# Altium PCB WUST_DEMO.PcbDoc
Units mm, origin at the board's own origin, x right, y up, seen from the top; angles counter-clockwise.
Board outline 17.27 x 24.38 mm, 2 copper layers (Top Layer, Bottom Layer); 24 components, 27 nets, 115 pads, 29 vias.
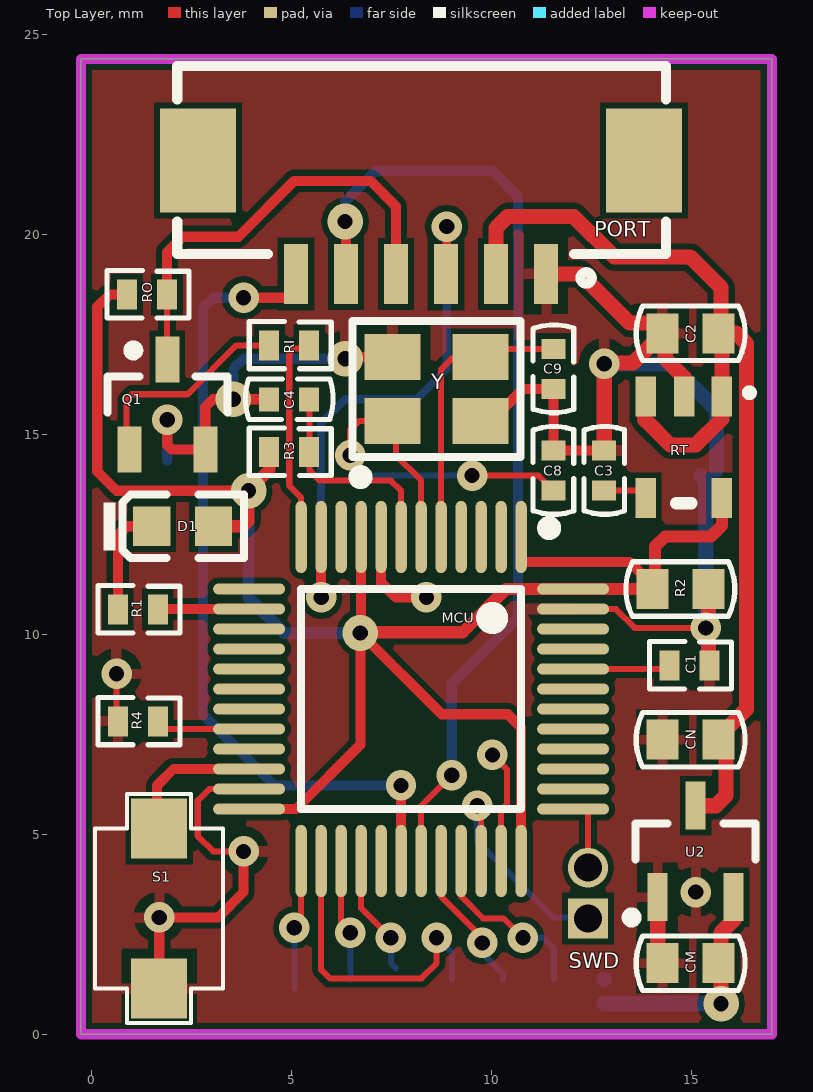
[diagram p0: Top Layer view]
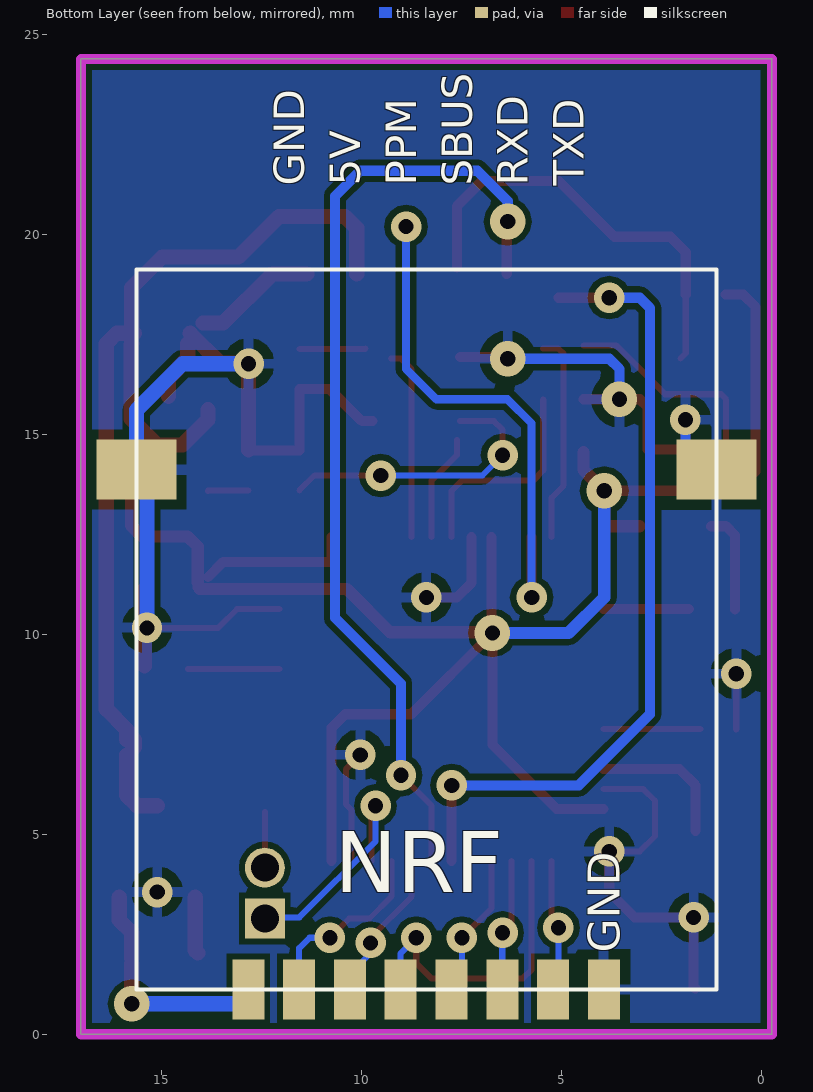
[diagram p1: Bottom Layer view, seen from below]
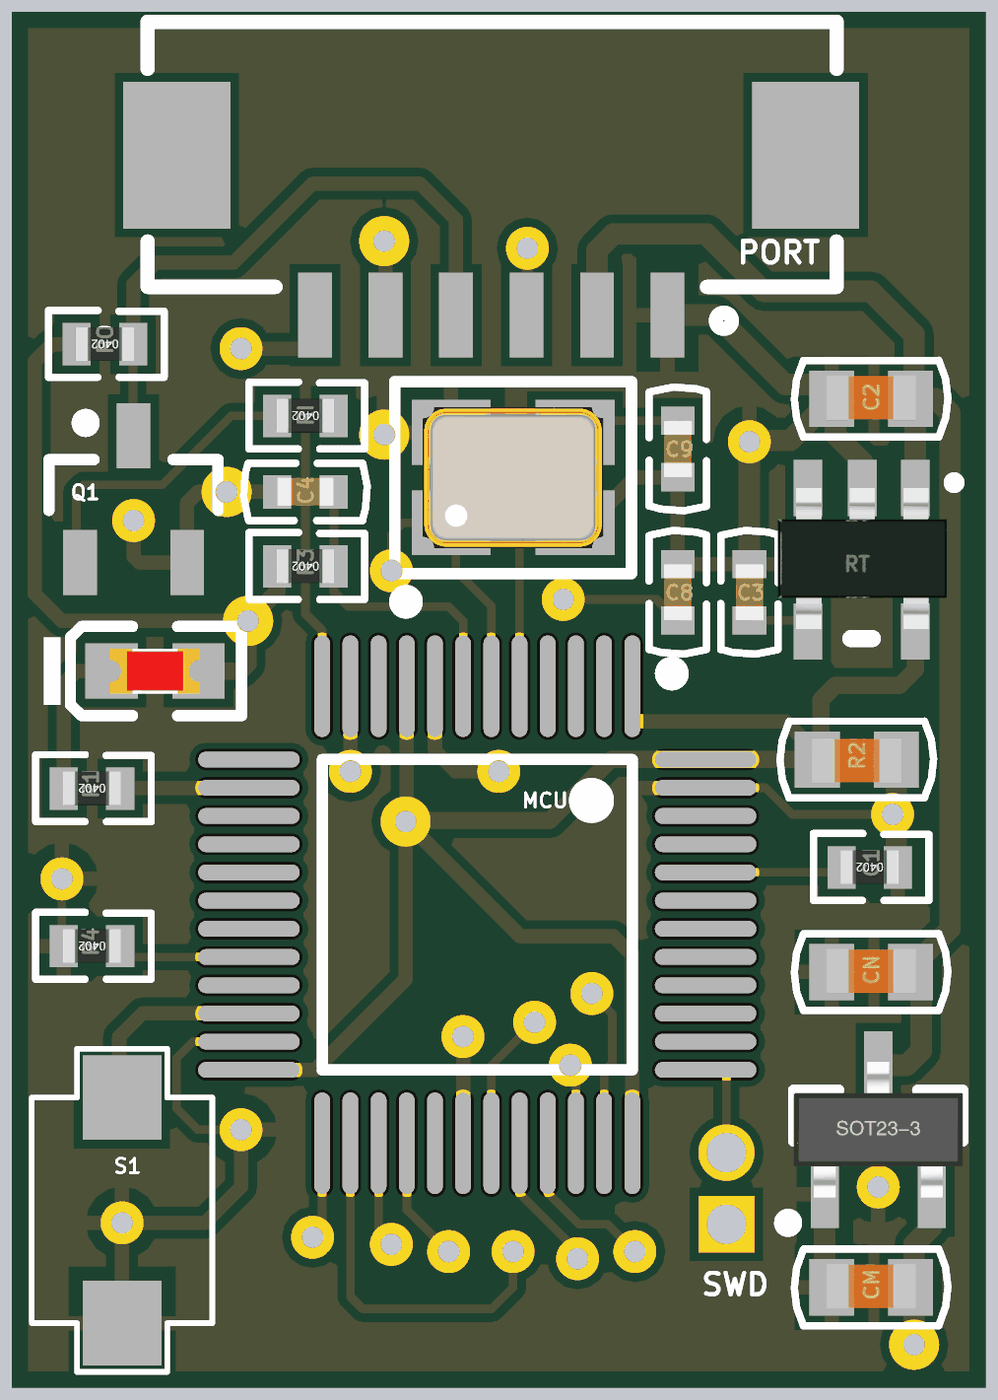
[diagram p2: 3D render of the assembled board from above, using the file's embedded part models]

## Layer stack, top to bottom
Top Solder: solder mask 0.0102, Solder Resist, Dk 3.5
Top Layer: signal copper 0.0356
Dielectric1: dielectric 0.32, FR-4, Dk 4.8
Bottom Layer: signal copper 0.0356
Bottom Solder: solder mask 0.0102, Solder Resist, Dk 3.5

## Board outline
-0.254,0 -0.254,24.384 17.018,24.384 17.018,0

## Design rules (kind name [scope] priority, off if disabled: settings)
Clearance [All] p1: gap=0.152 ignorepadtopadclearanceinfootprint=FALSE except(0: Arc-Hole Track-Hole SMDPad-Hole THPad-Hole Via-Hole Fill-Hole Poly-Hole Region-Hole Text-Hole)
ComponentClearance [All] p1: gap=0 collisioncheckmode=3 verticalgap=0 showdistances=FALSE
FabricationTestpoint [(IsPad And (OnTopLayer Or OnBottomLayer))] p1: side=3 testpointundercomponent=TRUE minsize=1.016 maxsize=2.54 preferedsize=1.524 minholesize=0 maxholesize=1.016 preferedholesize=0.813 testpointgrid=0.025 allowsidetop=TRUE allowsidebottom=TRUE usegrid=TRUE gridtolerance=0
HoleSize [All] p1: absolutevalues=TRUE maxlimit=7.62 minlimit=0.025 maxpercent=80.000 minpercent=20.000
HoleToHoleClearance [All] p1: gap=0 allowstackedmicrovias=TRUE
MinimumSolderMaskSliver [All] p1: minsoldermaskwidth=0
PolygonConnect [All] p1: connectstyle=Relief reliefconductorwidth=0.254 reliefentries=4 polygonreliefangle="90 Angle" airgapwidth=0.254
RoutingVias [All] p1: holewidth=0.711 width=1.27 viastyle="Through Hole" minholewidth=0.381 minwidth=0.635 maxholewidth=7.62 maxwidth=12.7
SilkToSilkClearance [All] p1: silktosilkclearance=0
SilkToSolderMaskClearance SilkscreenOverComponentPads [IsPad] p1: minsilkscreentomaskgap=0 clearancetoexposedcopper=TRUE
SolderMaskExpansion [All] p1: expansion=0
Width [All] p1: maxlimit=2.54 minlimit=0.152 preferedwidth=0.152
23 further rules are at their usual default settings.

## Components (designator, comment, footprint, x,y, rotation, side; value= is the part's Value field where it differs from the comment)
C1 "Cap" 0603C 14.732,11.132 r180 top value=1uF
C2 "Cap" 0603C 14.986,17.526 r0 top value=1uF
C3 "Cap" 0402C 12.827,14.097 r270 top value=0.1uF
C4 "Cap" 0402C 4.953,15.875 r0 top value=104
C8 "Cap" 0402C 11.557,14.097 r270 top value=12pf
C9 "Cap" 0402C 11.557,16.637 r270 top value=12pf
CM "1uf" 0603C 14.986,1.778 r0 top
CN "1uf" 0603C 14.986,7.366 r0 top
D1 "LED" 0603_LED 2.286,12.7 r0 top
MCU "STM32F103C" LQFP-48_7x7x05P 8.001,8.382 r180 top
NRF "Header 10" PE01-ML01SP4 8.382,7.62 r90 bottom
PORT "Header 6" 1.25_6P 8.001,21.336 r0 top
Q1 "NPN" SOT23_N 1.905,15.748 r90 top
R1 "470R" 0402R 1.169,10.668 r180 top value=0402
R2 "Res2" 0402R 14.961,9.271 r180 top value=0402
R3 "Res2" 0402R 4.953,14.605 r180 top value=0402
R4 "Res2" 0402R 1.169,7.874 r180 top value=0402
RI "res1" 0402R 4.953,17.272 r180 top value=1K
RO "Res1" 0402R 1.397,18.542 r180 top value=10K
RT "RT9193" SOT23_5 14.818,14.859 r180 top
S1 "微动开关" KEY3420P 1.651,3.048 r90 top
SWD "Header 2" pad 12.446,2.921 r90 top
U2 "662K" SOT23-3N 15.113,4.572 r0 top
Y "25M" SMD-3225_4P 8.636,16.129 r0 top

## Footprints (in the part's own frame and the unit in brackets; to place one, negate y for a bottom-side part, rotate by r counter-clockwise, add the part's x,y. Pads: shape width x height; smd on the part's side, far side on the other; paste and mask are expansions set on the pad)
1.25_6P [mm]
  rect 0.6x1.5 smd: 1(3.373,-2.327) 2(2.123,-2.327) 3(0.873,-2.327) 4(-0.377,-2.327) 5(-1.627,-2.327) 6(-2.877,-2.327)
  rect 1.9x2.6 smd: 7(-5.327,0.508) 8(5.823,0.508)
  silkscreen extent -5.85,-2.57 6.37,2.87
0402C [mm]
  rect 0.5x0.6 smd: 1(-0.5,0) 2(0.5,0)
  silkscreen extent -1.1,-0.51 1.1,0.51, body extent -0.5,-0.25 0.5,0.25, height 0.6
0402R [mm]
  rect 0.5x0.75 smd: 1(-0.5,0.05) 2(0.5,0.05)
  silkscreen extent -1.05,-0.55 1,0.64, body extent -0.52,-0.25 0.52,0.35, height 0.34
0603_LED [mm]
  rect 0.93x0.98 smd: 1(0.77,0) 2(-0.77,0)
  silkscreen extent -1.97,-0.79 1.54,0.79, body extent -0.8,-0.4 0.8,0.4, height 0.6
0603C [mm]
  rect 0.8x1 smd: 1(-0.7,0) 2(0.7,0)
  silkscreen extent -1.36,-0.68 1.36,0.68, body extent -0.8,-0.38 0.8,0.42, height 0.5
KEY3420P [mm]
  rect 1.5x1.4 smd: 1(-1.905,-0.051) 2(2.095,-0.051)
  silkscreen extent -2.77,-1.65 2.96,1.55
LQFP-48_7x7x05P [mm]
  oval 0.28x1.8 smd mask+0.051: 1(-2.75,-4.05) 2(-2.25,-4.05) 3(-1.75,-4.05) 4(-1.25,-4.05) 5(-0.75,-4.05) 6(-0.25,-4.05) 7(0.25,-4.05) 8(0.75,-4.05) 9(1.25,-4.05) 10(1.75,-4.05) 11(2.25,-4.05) 12(2.75,-4.05) 25(2.75,4.05) 26(2.25,4.05) 27(1.75,4.05) 28(1.25,4.05) 29(0.75,4.05) 30(0.25,4.05) 31(-0.25,4.05) 32(-0.75,4.05) 33(-1.25,4.05) 34(-1.75,4.05) 35(-2.25,4.05) 36(-2.75,4.05)
  oval 1.8x0.28 smd mask+0.051: 13(4.05,-2.75) 14(4.05,-2.25) 15(4.05,-1.75) 16(4.05,-1.25) 17(4.05,-0.75) 18(4.05,-0.25) 19(4.05,0.25) 20(4.05,0.75) 21(4.05,1.25) 22(4.05,1.75) 23(4.05,2.25) 24(4.05,2.75) 37(-4.05,2.75) 38(-4.05,2.25) 39(-4.05,1.75) 40(-4.05,1.25) 41(-4.05,0.75) 42(-4.05,0.25) 43(-4.05,-0.25) 44(-4.05,-0.75) 45(-4.05,-1.25) 46(-4.05,-1.75) 47(-4.05,-2.25) 48(-4.05,-2.75)
  silkscreen extent -3.6,-4.42 2.75,2.75
pad [mm]
  rect 1x1 hole 0.7: 1(-0.025,0.025)
  round 1 hole 0.7: 2(1.245,0.025)
PE01-ML01SP4 [mm] "18mm*14.5mm*2.4mm-S"
  rect 1.5x0.8 smd: 1(-6.497,4.453) 2(-6.497,3.183) 3(-6.497,1.913) 4(-6.497,0.643) 5(-6.497,-0.627) 6(-6.497,-1.897) 7(-6.497,-3.167) 8(-6.497,-4.437)
  rect 1.5x2 smd: 9(6.497,-7.25) 10(6.497,7.25)
  silkscreen extent -6.5,-7.25 11.5,7.25
SMD-3225_4P [mm]
  rect 1.4x1.15 smd: 1(-1.1,-0.8) 2(1.1,-0.8) 3(1.1,0.8) 4(-1.1,0.8)
  silkscreen extent -2.1,-2.35 2.1,1.7, body extent -1.6,-1.25 1.6,1.25, height 0.61
SOT23-3N [mm]
  rect 0.5x1.2 smd: 1(-0.95,-1.143) 2(0.95,-1.143) 3(0,1.143)
  silkscreen extent -1.72,-1.78 1.5,0.7, body extent -1.5,-1.2 1.5,1.2, height 1.05
SOT23_5 [mm]
  rect 0.508x1 smd: 1(-0.952,-1.084) 2(-0.012,-1.084) 3(0.953,-1.084) 4(0.953,1.456) 5(-0.952,1.456)
  silkscreen extent -1.7,-1.24 0.19,1.58, body extent -1.51,-1.08 1.49,1.42, height 1.05
SOT23_N [mm]
  rect 1.15x0.6 smd: 1(1.125,0) 2(-1.125,-0.95) 3(-1.125,0.95)
  silkscreen extent -0.2,-1.5 1.47,1.5, body extent -0.7,-1.5 0.7,1.5, height 1.1

## Part data
C1 C2 C3: "无极性电容", LatestRevisionDate=17-Jul-2002, LatestRevisionNote="Re-released for DXP Platform.", PackageReference=RAD-0.3, Published=8-Jun-2000, Publisher="Altium Limited"
C4 C8 C9: library part Cap-0.1Uf
CM CN: library part C, "无极性贴片电容", BOM名称=无极性贴片电容, 学习资源=www.ooocke.com, 版权归属=源创客
D1: library part Led0
MCU: "STM32单片机48引脚"
NRF: "Header, 10-Pin", LatestRevisionDate=17-Jul-2002, LatestRevisionNote="Re-released for DXP Platform.", Publisher="Altium Limited"
PORT: "Header, 6-Pin", LatestRevisionDate=17-Jul-2002, LatestRevisionNote="Re-released for DXP Platform.", Publisher="Altium Limited"
R1: library part Res2, "Resistor", LatestRevisionDate=17-Jul-2002, LatestRevisionNote="Re-released for DXP Platform.", PackageDescription="Axial Device, Thru-Hole; 2 Leads; 0.4 in Pin Spacing", PackageReference=AXIAL-0.4, Published=8-Jun-2000, Publisher="Altium Limited"
R2 R3 R4: "Resistor", LatestRevisionDate=17-Jul-2002, LatestRevisionNote="Re-released for DXP Platform.", PackageDescription="Axial Device, Thru-Hole; 2 Leads; 0.4 in Pin Spacing", PackageReference=AXIAL-0.4, Published=8-Jun-2000, Publisher="Altium Limited"
RO: "贴片电阻", LatestRevisionDate=17-Jul-2002, LatestRevisionNote="Re-released for DXP Platform.", PackageReference=AXIAL-0.4, Published=8-Jun-2000, Publisher="Altium Limited"
SWD: "Header, 2-Pin", LatestRevisionDate=17-Jul-2002, LatestRevisionNote="Re-released for DXP Platform.", Publisher="Altium Limited"
Y: library part XTAL_3225, "3225贴片无源晶振"

## Via types
v1: diameter 0.762, hole 0.381, Top Layer to Bottom Layer, 23 vias
v2: diameter 0.889, hole 0.381, Top Layer to Bottom Layer, 6 vias

## Nets (pads, with @x,y where several pads share a name; then routed paths per layer and width w, separated by ;. In a path a pad name is that pad's centre, name@x,y a point inside that pad or via, vN(x,y) a via of type N, cw(c..) or ccw(c..) an arc to the next point about the centre after c; other vN are vias at no path point)
GND: C1.1 C2.1 C3.1 C4.1 C8.1 C9.2 CM.1 CN.1 MCU.8 MCU.23 MCU.35 MCU.47 NRF.8 NRF.9 NRF.10 PORT.1 Q1.2 R2.1 R4.2 RT.2 S1.1 U2.1 Y.2 Y.4 | length 54.4
  Top Layer w0.152: R4.2@0.635,7.62 v1(0.635,9.017) ; v1(3.81,4.572) 3.048,4.572 2.667,4.953 2.667,5.842 2.957,6.132 MCU.23 ; v1(10.033,6.985) 10.395,6.623 10.395,5.746 10.251,5.602 MCU.35 ; MCU.47 13.117,10.632 13.589,10.16 v1(15.367,10.16)
  Top Layer w0.254: S1.1@1.651,1.143 1.702,1.194 v1(1.702,2.921) 3.175,2.921 3.81,3.556 v1(3.81,4.572) ; v1(1.905,15.367) 1.905,14.732 2.014,14.623 Q1.2 2.855,15.682 3.048,15.875 v2(3.556,15.875) C4.1 ; v2(6.35,16.891) 6.388,16.929 Y.4 ; MCU.8 7.251,11.291 7.62,10.922 v1@8.255,10.922 ; Y.2 9.995,15.329 10.795,16.129 11.557,16.129 C8.1@11.557,14.605 ; C8.1 12.819,14.597 C3.1@12.827,14.605
  Top Layer w0.381: PORT.1 12.233,19.009 13.462,17.78 C2.1@13.97,17.78 ; C3.1@12.827,14.605 v1(12.827,16.764) ; v1@12.849,16.786 13.546,16.786 C2.1 ; CM.1@14.097,2.032 14.163,2.098 U2.1 ; C2.1@14.351,17.272 14.351,16.891 14.83,16.412 RT.2 ; R2.1@15.432,9.206 C1.1
  Bottom Layer w0.254: NRF.9@1.905,14.351 v1(1.905,15.367) ; v2(3.556,15.875) 3.556,16.637 3.81,16.891 v2(6.35,16.891)
  Bottom Layer w0.381: v1@12.954,16.764 14.478,16.764 15.632,15.61 NRF.10 ; NRF.10@15.24,13.97 15.367,13.843 v1(15.367,10.16)
  other v1: 15.113,3.556 8.382,10.922
NetC3_2: C3.2 RT.4 | length 1
  Top Layer w0.152: C3.2 13.835,13.597 RT.4@13.843,13.589
NetC4_2: C4.2 MCU.7 R3.1 | length 5.4
  Top Layer w0.152: C4.2@5.461,15.875 5.461,14.097 5.715,13.843 7.493,13.843 7.751,13.585 MCU.7
NetD1_2: D1.2 R1.2 | length 2.6
  Top Layer w0.254: R1.2 0.669,12.48 0.889,12.7 D1.2@1.27,12.7
NetMCU_14: MCU.14 R1.1 | length 2.1
  Top Layer w0.254: R1.1@1.814,10.632 MCU.14
NetMCU_20: MCU.20 R4.1 | length 2.4
  Top Layer w0.152: R4.1@1.536,7.632 MCU.20
NetMCU_22: MCU.22 S1.2 | length 3.6
  Top Layer w0.254: S1.2@1.651,5.08 1.651,6.223 2.06,6.632 MCU.22
NetMCU_44: MCU.44 R2.2 | length 2.3
  Top Layer w0.152: MCU.44 R2.2@14.339,9.132
NetQ1_1: Q1.3 RI.2 | length 5.4
  Top Layer w0.152: Q1.3@0.889,14.605 0.889,15.875 1.016,16.002 2.413,16.002 3.633,17.222 RI.2
NRF_CE: MCU.33 NRF.2 | length 4.5
  Top Layer w0.152: MCU.33 9.251,3.449 9.804,2.896 10.312,2.896 v1(10.795,2.413)
  Bottom Layer w0.152: v1(10.795,2.413) 11.303,2.413 11.565,2.151 NRF.2@11.565,1.377
NRF_CSN: MCU.32 NRF.3 | length 3.6
  Top Layer w0.152: MCU.32 8.751,3.441 9.779,2.413 v1(9.779,2.286)
  Bottom Layer w0.152: v1(9.779,2.286) 9.779,2.032 10.295,1.516 NRF.3@10.295,1.377
NRF_IRQ: MCU.25 NRF.7 | length 3.3
  Top Layer w0.152: v1(5.08,2.667) 5.251,2.838 MCU.25
  Bottom Layer w0.152: NRF.7@5.08,1.143 v1(5.08,2.667)
OSC1: C8.2 MCU.6 Y.1 | length 9.9
  Top Layer w0.152: v1(6.477,14.478) 6.477,15.113 6.693,15.329 Y.1 ; Y.1@7.62,14.859 7.62,14.478 8.251,13.847 MCU.6 ; v1(9.525,13.97) 11.184,13.97 C8.2
  Bottom Layer w0.152: v1(6.477,14.478) 6.985,13.97 v1(9.525,13.97)
OSC2: C9.1 MCU.5 Y.3 | length 6.5
  Top Layer w0.152: MCU.5 8.751,16.625 9.017,16.891 Y.3@9.271,16.891 ; Y.3@9.906,17.145 9.914,17.137 C9.1
PPM_OUTPUT: MCU.11 PORT.3 | length 14.9
  Top Layer w0.152: PORT.3@8.874,18.558 PORT.3
  Top Layer w0.203: PORT.3@8.89,18.923 v1(8.89,20.193)
  Top Layer w0.254: v1@5.715,10.922 5.751,10.958 MCU.11
  Bottom Layer w0.203: v1(5.751,10.922) 5.751,15.276 6.35,15.875 8.128,15.875 8.89,16.637 v1(8.89,20.193)
SBUS_OUT: PORT.4 Q1.1 RO.1 | length 11
  Top Layer w0.152: RO.1 1.897,17.026 Q1.1@2.032,16.891
  Top Layer w0.254: RO.1 1.897,19.55 2.286,19.939 3.683,19.939 5.08,21.336 6.985,21.336 7.62,20.701 PORT.4@7.62,19.177
SBUS_TX: MCU.12 RI.1 | length 5.3
  Top Layer w0.152: MCU.12 5.251,13.418 4.953,13.716 4.953,17.018 5.08,17.145 RI.1@5.461,17.145
SPI1_MISO: MCU.27 NRF.6 | length 3.1
  Top Layer w0.152: MCU.27 6.251,2.766 v1(6.477,2.54)
  Bottom Layer w0.152: v1(6.477,2.54) 6.485,2.532 NRF.6@6.485,1.377
SPI1_MOSI: MCU.28 NRF.5 | length 3
  Top Layer w0.152: MCU.28 6.751,3.155 v1(7.493,2.413)
  Bottom Layer w0.152: v1(7.493,2.413) 7.493,1.778 NRF.5@7.62,1.651
SPI1_SCLK: MCU.26 NRF.4 | length 7.7
  Top Layer w0.152: MCU.26 5.751,1.615 5.969,1.397 8.255,1.397 8.636,1.778 v1(8.636,2.413)
  Bottom Layer w0.152: v1(8.636,2.413) 9.025,2.024 NRF.4@9.025,1.377
SWCLK: MCU.37 SWD.2 | length 1.4
  Top Layer w0.152: SWD.2 MCU.37@12.421,5.563
SWDIO: MCU.34 SWD.1 | length 6
  Top Layer w0.152: MCU.34 v1@9.751,5.814
  Bottom Layer w0.152: v1(9.652,5.715) 9.652,4.826 11.557,2.921 SWD.1@12.446,2.921
UART1_RX: MCU.31 PORT.5 | length 24.2
  Top Layer w0.152: MCU.31 8.251,5.711 v1(9.017,6.477)
  Top Layer w0.254: v2@6.35,20.193 6.374,20.169 PORT.5
  Bottom Layer w0.254: v2(6.35,20.32) 6.35,20.828 7.112,21.59 10.033,21.59 10.668,20.955 10.668,10.414 9.017,8.763 v1(9.017,6.477)
UART1_TX: MCU.30 PORT.6 | length 20.2
  Top Layer w0.254: v1(3.81,18.415) PORT.6@5.08,18.415 ; MCU.30 v1@7.751,6.219
  Bottom Layer w0.254: v1@3.81,18.288 3.683,18.415 3.048,18.415 2.794,18.161 2.794,8.001 4.572,6.223 v1(7.747,6.223)
VCC_3V3: C1.2 D1.1 MCU.1 MCU.9 MCU.24 MCU.36 MCU.48 R3.2 RO.2 RT.5 | length 49.8
  Top Layer w0.254: RO.2 0.458,18.492 0.152,18.186 0.152,14.072 0.635,13.589 v2(3.937,13.589) ; MCU.24 5.124,5.632 6.731,7.239 v2(6.731,10.033) ; MCU.9 6.751,10.053 v2(6.731,10.033) ; MCU.36 10.751,7.664 10.414,8.001 8.763,8.001 v2(6.731,10.033) ; MCU.1 10.751,11.811 13.462,11.811 C1.2@13.843,11.43 ; C1.2@14.053,11.132 C1.2@14.097,11.176
  Top Layer w0.305: D1.1 3.81,12.7 3.937,12.827 v2(3.937,13.589) 4.453,14.105 R3.2 ; v2@6.751,10.053 9.291,10.053 10.37,11.132 MCU.48 C1.2@14.053,11.132 ; C1.2@14.097,11.303 14.097,12.192 14.351,12.446 15.494,12.446 15.77,12.722 RT.5
  Bottom Layer w0.305: v2(3.937,13.589) 3.937,10.922 4.826,10.033 v2(6.731,10.033)
VCC_5.0: C2.2 CN.2 PORT.2 RT.1 RT.3 U2.3 | length 26.2
  Top Layer w0.381: PORT.2 10.124,20.157 10.414,20.447 12.065,20.447 13.081,19.431 14.986,19.431 15.748,18.669 C2.2@15.748,17.653 ; RT.3@13.843,15.621 13.843,15.367 14.478,14.732 15.113,14.732 15.77,15.389 RT.1 15.77,17.25 C2.2@15.748,17.272 ; U2.3 15.621,5.715 15.875,5.969 CN.2@15.875,6.985 ; CN.2@15.686,7.177 CN.2 ; C2.2 16.129,17.526 16.383,17.272 16.383,8.128 15.875,7.62 CN.2@15.875,7.366
VCC_NRF: CM.2 NRF.1 U2.2 | length 5.6
  Top Layer w0.381: v2(15.748,0.762) CM.2@15.748,1.778 ; CM.2@15.748,1.905 15.748,2.54 16.063,2.855 U2.2
  Bottom Layer w0.381: NRF.1@12.827,0.762 v2(15.748,0.762) ; NRF.1@12.827,1.385 NRF.1@12.835,1.377
pads on no net: MCU.2 MCU.3 MCU.4 MCU.10 MCU.13 MCU.15 MCU.16 MCU.17 MCU.18 MCU.19 MCU.21 MCU.29 MCU.38 MCU.39 MCU.40 MCU.41 MCU.42 MCU.43 MCU.45 MCU.46 PORT.7 PORT.8

## Polygon pours and split planes (outlines as drawn)
GND on Top Layer "Top Layer-No Net" (solid, remove dead copper, pour order 48): -0.254,0 17.018,0 17.018,24.384 -0.254,24.384
GND on Bottom Layer "Top Layer-No Net" (solid, remove dead copper, pour order 50): -0.254,0 17.018,0 17.018,24.384 -0.254,24.384

## Keep-outs
Keep-Out Layer:
  the board outline again, w0.254

## Silkscreen, mask and mechanical layers (free items; w line width, h text height)
Bottom Overlay:
  text "TXD" at 4.445,21.209 h0.76 r270
  text "RXD" at 5.842,21.209 h0.76 r270
  text "SBUS" at 7.239,21.209 h0.76 r270
  text "PPM" at 8.636,21.209 h0.76 r270
  text "5V" at 10.033,21.209 h0.76 r270
  text "GND" at 11.43,21.209 h0.76 r270

## Text inside footprints (layer, text, board x,y; h text height)
NRF: Bottom Overlay "GND" at 3.542,2.044 h0.8 r270